# EAGLE board RGB-VIDEO (EAGLE 7.2.0)
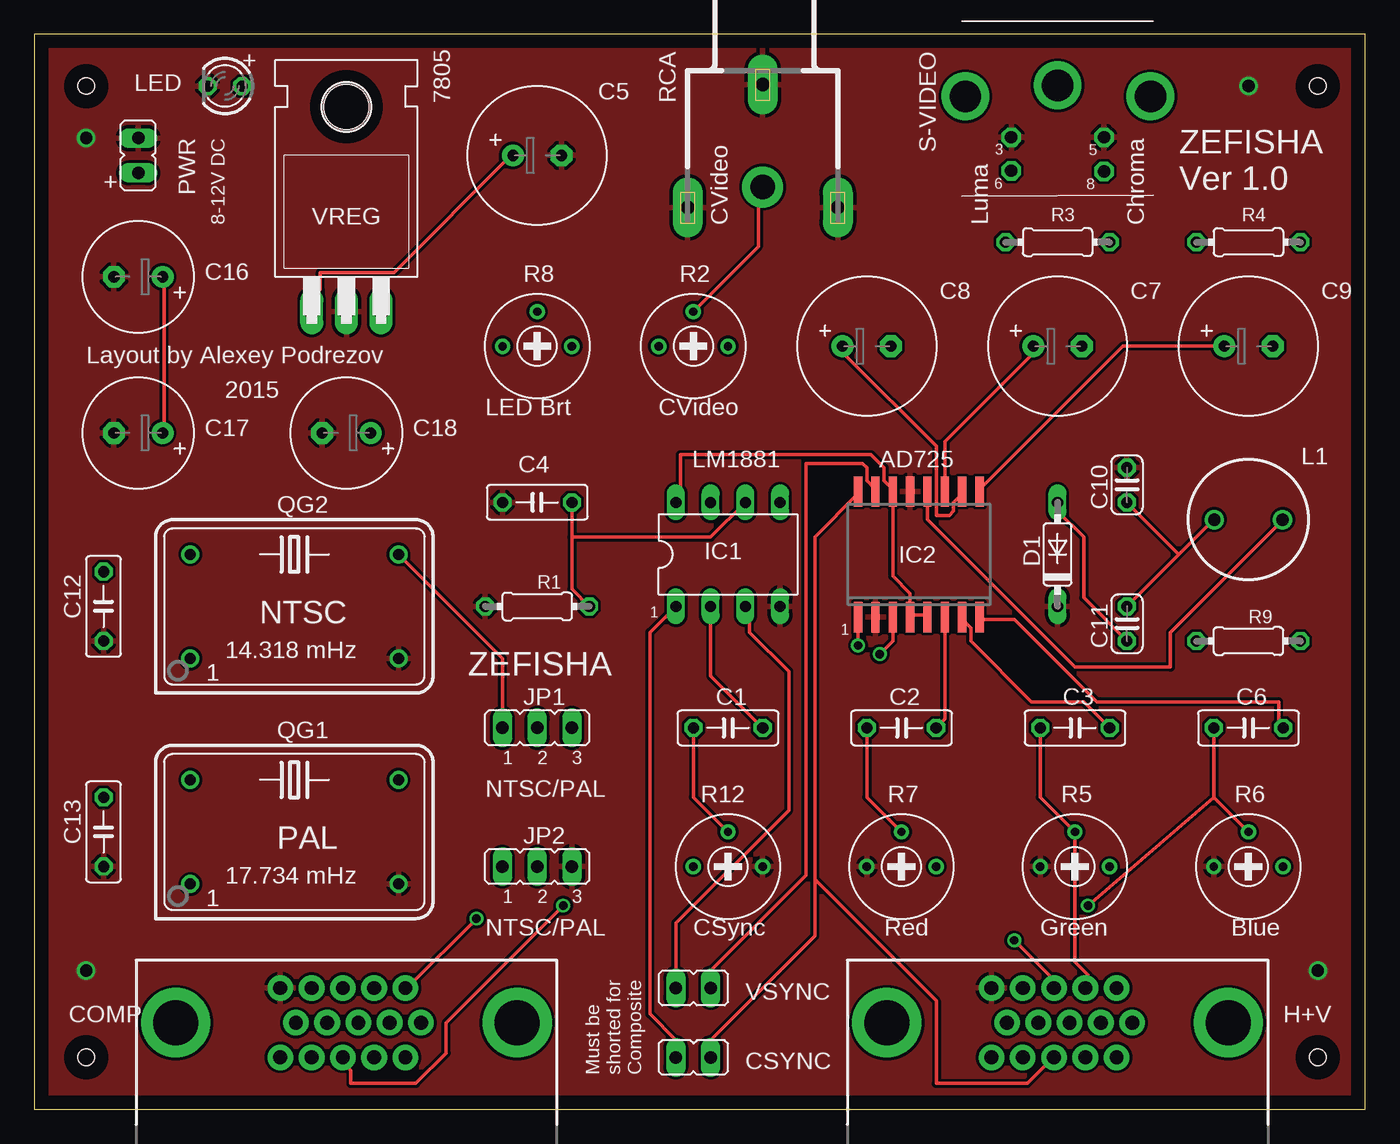
[diagram p0: board, top side]
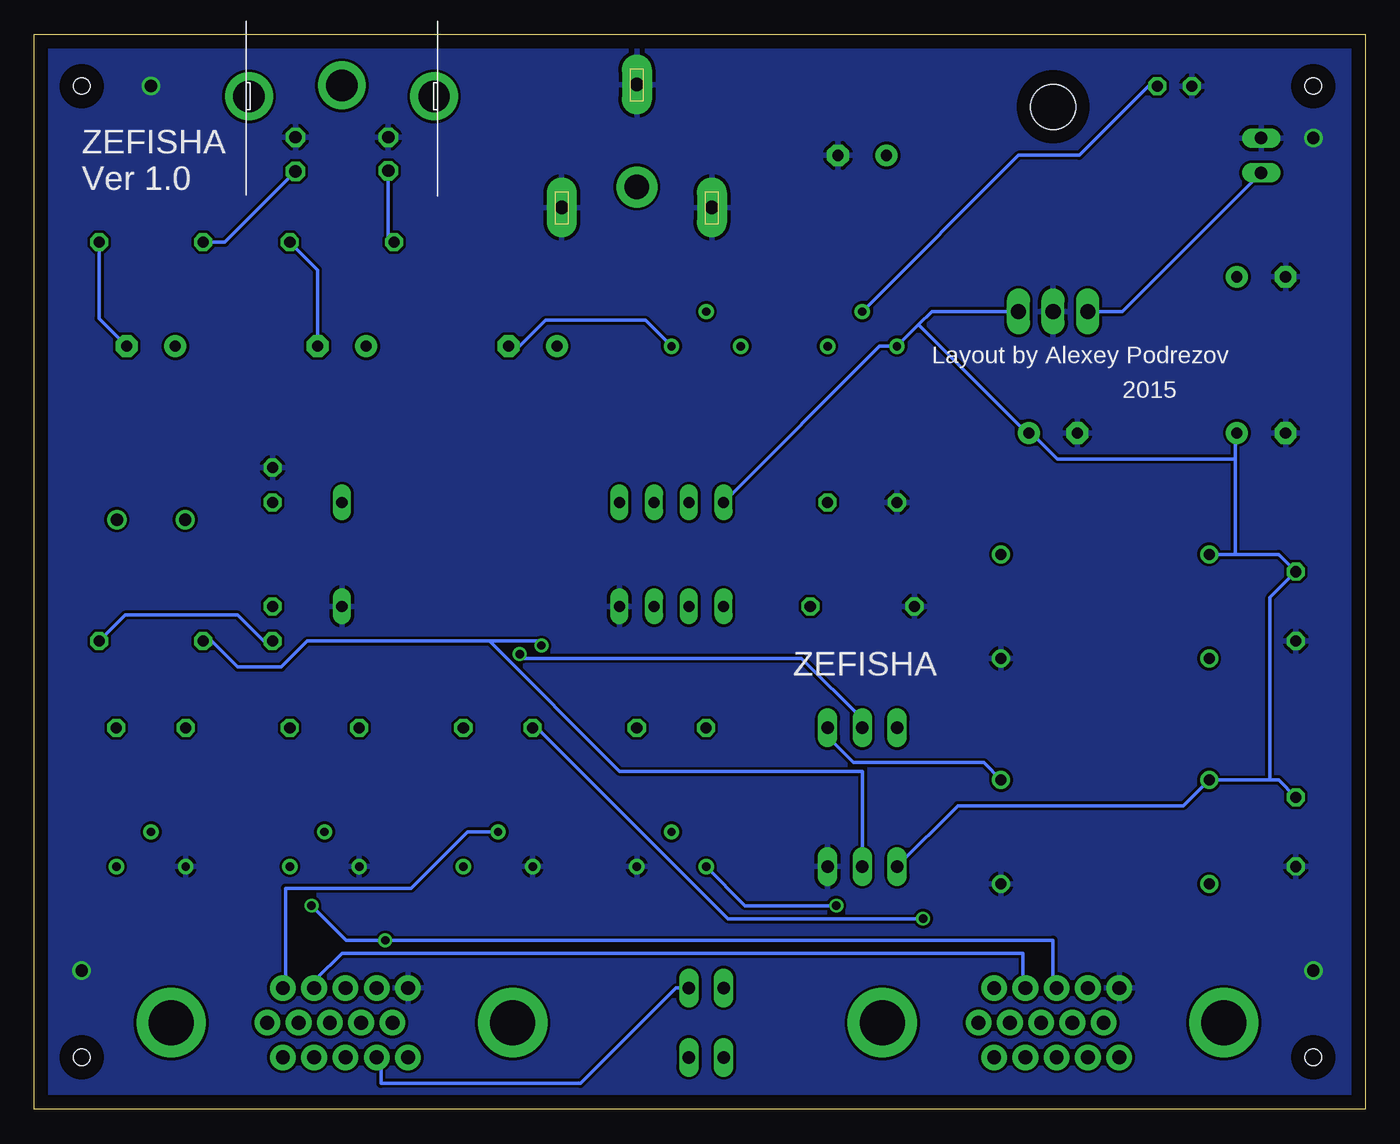
[diagram p1: board, bottom side, seen from below]

Size 97.46 x 78.73 mm. Coordinates in mm from the lower left corner, seen from the top.
Outline: 0,0 97.46,0 97.46,78.73 0,78.73 0,0
Copper layers (1*16): Top 0.035mm / dielectric 1.5mm / Bottom 0.035mm
Design rules "default": minimum track width 10mil, minimum drill 24mil, track to track 8mil, track to pad 8mil, pad to pad 8mil, via to via 8mil, smd to smd 8mil, copper to edge 40mil, drill to drill 8mil, minimum pad ring 10mil, minimum via ring 8mil, stop-mask expansion 4mil, vias tented up to drill 0mil, thermal gap 10mil
Holes 1.2 mm at 3.81,74.93 93.98,74.93 93.98,3.81 3.81,3.81

## Footprints (pad centres in the part's own frame; a part is rotated, then mirrored left to right if it is on the bottom)
C050-025X075 = drill 0.813 octagon: 1 -2.54,0; 2 2.54,0
E3,5-10 = drill 0.813 pad 1.6: + -1.778,0 | drill 0.813 pad 1.6 octagon: - 1.778,0
C025-024X044 = drill 0.813 octagon: 1 -1.27,0; 2 1.27,0
E3,5-8 = drill 0.813 pad 1.6: + -1.778,0 | drill 0.813 pad 1.6 octagon: - 1.778,0
JP1 = drill 0.914 long: 1 0,-1.27; 2 0,1.27
DO35-7 = drill 0.813 long: A 3.81,0; C -3.81,0
DIL08 = drill 0.813 long: 1 -3.81,-3.81; 2 -1.27,-3.81; 3 1.27,-3.81; 4 3.81,-3.81; 5 3.81,3.81; 6 1.27,3.81; 7 -1.27,3.81; 8 -3.81,3.81
SO16W = smd 0.6 x 2.2: 1 -4.445,-4.6; 2 -3.175,-4.6; 3 -1.905,-4.6; 4 -0.635,-4.6; 5 0.635,-4.6; 6 1.905,-4.6; 7 3.175,-4.6; 8 4.445,-4.6; 9 4.445,4.6; 10 3.175,4.6; 11 1.905,4.6; 12 0.635,4.6; 13 -0.635,4.6; 14 -1.905,4.6; 15 -3.175,4.6; 16 -4.445,4.6
TO220H = drill 1.118 long: 1 -2.54,-10.16; 2 0,-10.16; 3 2.54,-10.16 | hole 3.302: 0,4.826
JP2 = drill 0.914 long: 1 -2.54,0; 2 0,0; 3 2.54,0
6000-XXXX-RC = drill 0.9 pad 1.422: 1 -2.5,0; 2 2.5,0
LED3MM = drill 0.813 octagon: A -1.27,0; K 1.27,0
DIL14S = drill 0.813: 1 -7.62,-3.81; 7 7.62,-3.81; 8 7.62,3.81; 14 -7.62,3.81
0204/7 = drill 0.813 octagon: 1 -3.81,0; 2 3.81,0
RTRIM3339P = drill 0.61: 1 -2.54,0; 2 0,-2.54; 3 2.54,0
736880-49 = drill 1 pad 2.2 long: 1 -3.92,0; 1@1 5.08,-5.5; 1@2 5.08,5.5 | drill 1.8 pad 3: 2 3.58,0
M_DIN4 = drill 0.9 pad 1.422 octagon: 3 -3.4,-3.75; 5 3.4,-3.75; 6 -3.4,-6.2; 8 3.4,-6.25 | drill 2.3 pad 3.5: SH1 6.8,-0.75; SH2 0,0.05; SH3 -6.75,-0.75
DB15 = drill 1.016 pad 1.88: 1 -4.32,-7.62; 2 -2.03,-7.62; 3 0.26,-7.62; 4 2.55,-7.62; 5 4.84,-7.62; 6 -5.46,-5.08; 7 -3.17,-5.08; 8 -0.88,-5.08; 9 1.41,-5.08; 10 3.7,-5.08; 11 -4.32,-2.54; 12 -2.03,-2.54; 13 0.26,-2.54; 14 2.55,-2.54; 15 4.84,-2.54 | drill 3.302 pad 5.08: G1 -12.5,-5.08; G2 12.5,-5.08

## Placement (x,y rotation side)
C1  100 nF  [C050-025X075]  50.8,27.94 0 top
C2  100 nF  [C050-025X075]  63.5,27.94 0 top
C3  100 nF  [C050-025X075]  76.2,27.94 0 top
C4  100 nF  [C050-025X075]  36.83,44.45 180 top
C5  100 mF  [E3,5-10]  36.83,69.85 0 top
C6  100 nF  [C050-025X075]  88.9,27.94 0 top
C7  220 mF  [E3,5-10]  74.93,55.88 0 top
C8  220 mF  [E3,5-10]  60.96,55.88 0 top
C9  220 mF  [E3,5-10]  88.9,55.88 0 top
C10  18 pF  [C025-024X044]  80.01,45.72 90 top
C11  9 pF  [C025-024X044]  80.01,35.56 90 top
C12  100 nF  [C050-025X075]  5.08,36.83 90 top
C13  100 nF  [C050-025X075]  5.08,20.32 90 top
C16  10 mF  [E3,5-8]  7.62,60.96 180 top
C17  10 mF  [E3,5-8]  7.62,49.53 180 top
C18  10 mF  [E3,5-8]  22.86,49.53 180 top
CSYNC  +  [JP1]  48.26,3.81 270 top
D1  1N4148DO35-7  [DO35-7]  74.93,40.64 90 top
IC1  LM1881  [DIL08]  50.8,40.64 0 top
IC2  AD725  [SO16W]  64.77,40.64 0 top
IC3  7805T  [TO220H]  22.86,68.58 0 top
JP1  NTSC/PAL  [JP2]  36.83,27.94 0 top
JP2  NTSC/PAL  [JP2]  36.83,17.78 0 top
L1  68 mH  [6000-XXXX-RC]  88.9,43.18 0 top
LED  2.5V  [LED3MM]  13.97,74.93 180 top
PWR  +  [JP1]  7.62,69.85 180 top
QG1  17.734 MHz  [DIL14S]  19.05,20.32 0 top
QG2  14.318 MHz  [DIL14S]  19.05,36.83 0 top
R1  680 kOhm  [0204/7]  36.83,36.83 0 top
R2  1 kOhm  [RTRIM3339P]  48.26,55.88 180 top
R3  75 Ohm  [0204/7]  74.93,63.5 180 top
R4  75 Ohm  [0204/7]  88.9,63.5 180 top
R5  100 Ohm  [RTRIM3339P]  76.2,17.78 180 top
R6  100 Ohm  [RTRIM3339P]  88.9,17.78 180 top
R7  100 Ohm  [RTRIM3339P]  63.5,17.78 180 top
R8  1 kOhm  [RTRIM3339P]  36.83,55.88 180 top
R9  47 kOhm  [0204/7]  88.9,34.29 0 top
R12  1 kOhm  [RTRIM3339P]  50.8,17.78 180 top
RCA  736880-49  [736880-49]  53.34,71.12 270 top
S-VIDEO  DIN4  [M_DIN4]  74.93,74.93 0 top
VGA_CSYNC  DB15  [DB15]  22.86,1.27 180 top
VGA_HVSYNC  DB15  [DB15]  74.93,1.27 180 top
VSYNC  +  [JP1]  48.26,8.89 270 top

## Library data of the parts
C1-C13 C16-C18 L1 = rcl
CSYNC JP1 JP2 PWR VSYNC = jumper
D1 = diode
IC1 = lm1881
IC2 = ad725
IC3 = linear
LED = led
QG1 QG2 = crystal; OC_FARNELL: unknown; OC_NEWARK: unknown
R1-R9 R12 = resistor
RCA = con-conrad
S-VIDEO = mini_din
VGA_CSYNC VGA_HVSYNC = SparkFun-Connectors

## Nets
+5V: C12.2 C13.2 C16.+ C17.+ C18.+ IC1.8 IC2.4 IC2.5 IC2.14 IC3.3 JP2.1 QG1.14 QG2.14 R8.3
CSYNC: CSYNC.1 IC1.1
GND: C4.2 C5.- C10.2 C12.1 C13.1 C16.- C17.- C18.- D1.C IC1.4 IC2.2 IC2.13 IC3.2 JP2.3 LED.K PWR.1 QG1.7 QG2.7 R1.1 R5.3 R6.3 R7.3 R12.1 RCA.1 RCA.1@1 RCA.1@2 S-VIDEO.3 S-VIDEO.5 VGA_CSYNC.5 VGA_HVSYNC.5
HSYNC: CSYNC.2 IC2.16 VGA_HVSYNC.13
N$1: C4.1 IC1.6 R1.2
N$2: C1.2 IC1.2
N$4: LED.A R8.2
N$5: JP1.1 QG2.8
N$6: JP1.3 QG1.8
N$7: IC2.3 JP1.2
N$8: C2.2 IC2.6
N$9: C3.2 IC2.7
N$10: C6.2 IC2.8
N$11: C2.1 R7.2 VGA_CSYNC.1 VGA_HVSYNC.1
N$12: C3.1 R5.2 VGA_CSYNC.2 VGA_HVSYNC.2
N$13: C6.1 R6.2 VGA_CSYNC.3 VGA_HVSYNC.3
N$14: C8.- R2.1
N$15: R2.2 RCA.2
N$16: C7.- R3.1
N$17: R3.2 S-VIDEO.6
N$18: C7.+ IC2.11
N$19: C8.+ IC2.10
N$20: C9.+ IC2.9
N$21: C9.- R4.1
N$22: R4.2 S-VIDEO.8
N$23: C11.1 D1.A R9.2
N$24: C10.1 C11.2 L1.1
N$25: IC2.12 L1.2
N$26: IC1.3 VSYNC.1
N$28: C1.1 R12.2
PE1: S-VIDEO.SH1
PE2: S-VIDEO.SH2
PE3: S-VIDEO.SH3
STND: IC2.1 JP2.2 R9.1
VCC: C5.+ IC3.1 PWR.2
VGA_CSYNC: R12.3 VGA_CSYNC.13
VSYNC: IC2.15 VGA_HVSYNC.14 VSYNC.2

## Tracks (layer width: path | path; a pad name or v marks a point on that pad's centre or on a via)
+5V
  Top 0.254: 64.14,36.2 65.41,36.2 IC2.5 | 64.14,36.2 64.14,37.78 62.87,39.05 IC2.14 62.87,45.4 62.23,46.04 62.23,46.99 61.28,47.94 47.31,47.94 47.31,44.77 IC1.8 | 64.14,36.2 IC2.4 | C16.+ 9.53,60.96 9.53,49.53 C17.+
  Bottom 0.254: 32.7,57.47 31.75,58.42 IC3.3 | 32.7,57.47 R8.3 35.56,55.88 IC1.8 | 32.7,57.47 24.77,49.53 C18.+ 24.45,49.53 22.54,47.62 9.53,47.62 | QG2.14 9.53,40.64 | 9.53,40.64 6.35,40.64 C12.2 6.99,37.47 6.99,24.13 | 9.53,40.64 9.53,47.62 | 9.53,47.62 9.53,49.53 C17.+ | C13.2 6.35,24.13 6.99,24.13 | 6.99,24.13 QG1.14 13.34,22.23 29.84,22.23 JP2.1
CSYNC
  Top 0.254: IC1.1 45.08,34.92 45.08,6.99 46.99,5.08 CSYNC.1
GND  (via drill 0.9)
  other vias: 88.9,74.93 93.98,10.16 3.81,10.16 3.81,71.12
  pour Bottom: -1.27,0 -1.27,-1.27 99.06,-1.27 99.06,80.01 -1.27,80.01
  pour Top: -2.54,81.28 100.33,81.28 100.33,-2.54 -2.54,-2.54
HSYNC
  Top 0.254: 57.15,16.83 57.15,12.7 49.53,5.08 CSYNC.2 | 57.15,16.83 57.15,41.91 60.32,45.09 IC2.16 | 57.15,16.83 66.04,7.94 66.04,1.91 72.71,1.91 74.61,3.81 VGA_HVSYNC.13
N$1
  Top 0.254: R1.2 39.37,38.1 39.37,41.91 | C4.1 39.37,41.91 | IC1.6 49.53,41.91 39.37,41.91
N$2
  Top 0.254: C1.2 49.53,31.75 IC1.2
N$4
  Bottom 0.254: R8.2 25.4,69.85 20.96,69.85 15.88,74.93 LED.A
N$5
  Top 0.254: QG2.8 34.29,33.02 JP1.1
N$6
  Bottom 0.254: QG1.8 27.94,25.4 37.46,25.4 39.37,27.3 JP1.3
N$7  (via drill 0.61)
  Top 0.254: IC2.3 62.87,34.29 v61.91,33.34
  Bottom 0.254: v61.91,33.34 61.59,33.02 41.27,33.02 36.83,28.57 JP1.2
N$8
  Top 0.254: IC2.6 66.67,28.57 C2.2
N$9
  Top 0.254: C3.2 76.84,29.84 73.03,29.84 68.58,34.29 68.58,35.24 67.95,35.88 IC2.7
N$10
  Top 0.254: C6.2 91.12,28.26 91.12,29.84 77.79,29.84 71.76,35.88 69.22,35.88 IC2.8
N$11  (via drill 0.61)
  Top 0.254: R7.2 60.96,22.86 C2.1 | v32.38,13.97 27.3,8.89 VGA_CSYNC.1
  Bottom 0.254: v32.38,13.97 46.67,13.97 60.64,27.94 C2.1 | R7.2 65.72,20.32 69.85,16.19 79.06,16.19 79.06,8.89 VGA_HVSYNC.1
N$12
  Top 0.254: C3.1 73.66,22.86 R5.2 76.2,10.79 77.15,9.84 77.15,8.89 VGA_HVSYNC.2
  Bottom 0.254: VGA_CSYNC.2 25.08,8.89 25.08,11.43 74.93,11.43 76.84,9.53 76.84,8.89 VGA_HVSYNC.2
N$13  (via drill 0.61)
  Top 0.254: 86.36,22.86 R6.2 | C6.1 86.36,22.86 | v71.76,12.38 74.61,9.53 74.61,8.89 VGA_HVSYNC.3 | v77.15,14.92 86.36,22.86
  Bottom 0.254: VGA_CSYNC.3 22.86,8.89 22.86,12.38 v71.76,12.38 74.61,12.38 v77.15,14.92
N$14
  Bottom 0.254: R2.1 52.7,57.78 60.01,57.78 61.91,55.88 C8.-
N$15
  Top 0.254: R2.2 53.02,63.18 53.02,66.99 53.34,67.31 RCA.2
N$16
  Bottom 0.254: C7.- 76.71,61.47 R3.1
N$17
  Bottom 0.254: S-VIDEO.6 71.53,63.91 R3.2
N$18
  Top 0.254: IC2.11 66.67,48.9 73.03,55.24 73.03,55.88 C7.+
N$19
  Top 0.254: IC2.10 67.95,45.09 67.31,44.45 67.31,43.81 66.99,43.5 66.04,43.5 66.04,48.58 59.37,55.24 59.37,55.88 C8.+
N$20
  Top 0.254: C9.+ 79.69,55.88 69.22,45.4 IC2.9
N$21
  Bottom 0.254: R4.1 92.71,57.91 C9.-
N$22
  Bottom 0.254: R4.2 83.51,63.5 S-VIDEO.8
N$23
  Top 0.254: C11.1 76.84,37.47 76.84,41.91 74.93,43.81 D1.A
  Bottom 0.254: R9.2 90.81,36.2 82.55,36.2 80.65,34.29 C11.1
N$24
  Top 0.254: 83.82,40.64 86.36,43.18 L1.1 | 83.82,40.64 C11.2 | 83.82,40.64 C10.1
N$25
  Top 0.254: IC2.12 65.41,43.18 76.2,32.38 83.19,32.38 83.19,34.92 91.12,42.86 91.12,43.18 L1.2
N$26
  Top 0.254: IC1.3 52.39,36.51 52.39,34.92 55.24,32.07 55.24,21.91 46.99,13.65 VSYNC.1
N$28
  Top 0.254: R12.2 48.26,22.86 C1.1
STND  (via drill 0.61)
  Top 0.254: v60.32,33.97 IC2.1
  Bottom 0.254: v60.32,33.97 60.64,34.29 64.14,34.29 | 64.14,34.29 77.47,34.29 79.38,32.38 82.55,32.38 84.45,34.29 R9.1 | JP2.2 36.83,24.77 54.61,24.77 64.14,34.29
VCC
  Top 0.254: IC3.1 20.32,59.37 20.96,60.01 20.96,61.28 26.35,61.28 34.92,69.85 C5.+
  Bottom 0.254: PWR.2 17.78,58.42 IC3.1
VGA_CSYNC  (via drill 0.61)
  Top 0.254: v38.73,14.92 30.16,6.35 30.16,4.13 27.94,1.91 23.18,1.91 23.18,2.86 22.86,3.17 22.86,3.81 VGA_CSYNC.13
  Bottom 0.254: R12.3 45.4,14.92 v38.73,14.92
VSYNC
  Top 0.254: VSYNC.2 49.53,10.16 56.51,17.14 56.51,47.31 60.64,47.31 60.96,46.99 60.96,46.04 61.59,45.4 IC2.15
  Bottom 0.254: VSYNC.2 50.48,8.89 57.47,1.91 72.07,1.91 72.07,3.81 VGA_HVSYNC.14

## Text on the board
tNames: S-VIDEO | + | 7805 | + | ZEFISHA / Ver 1.0 | 8-12V DC | VREG | CVideo | Luma | Chroma | Layout by Alexey Podrezov | 2015 | LED Brt | CVideo | LM1881 | AD725 | 1 | NTSC | 1 | 14.318 mHz | ZEFISHA | NTSC/PAL | PAL | 17.734 mHz | NTSC/PAL | CSync | Red | Green | Blue | COMP | H+V | Must be / shorted for / Composite
bNames: ZEFISHA / Ver 1.0 | Layout by Alexey Podrezov | 2015 | ZEFISHA